# Altium PCB FCM_Integrated.PcbDoc (part 2 of 3)
Units mil, origin at the board's own origin, x right, y up, seen from the top; angles counter-clockwise.
Board outline 5445 x 4366 mil, 4 copper layers (Top Layer, Power, Ground, Bottom Layer), stack 23.756 mil thick; 165 components, 92 nets, 629 pads, 170 vias.
Unrouted connection lines stored in the file: 134.
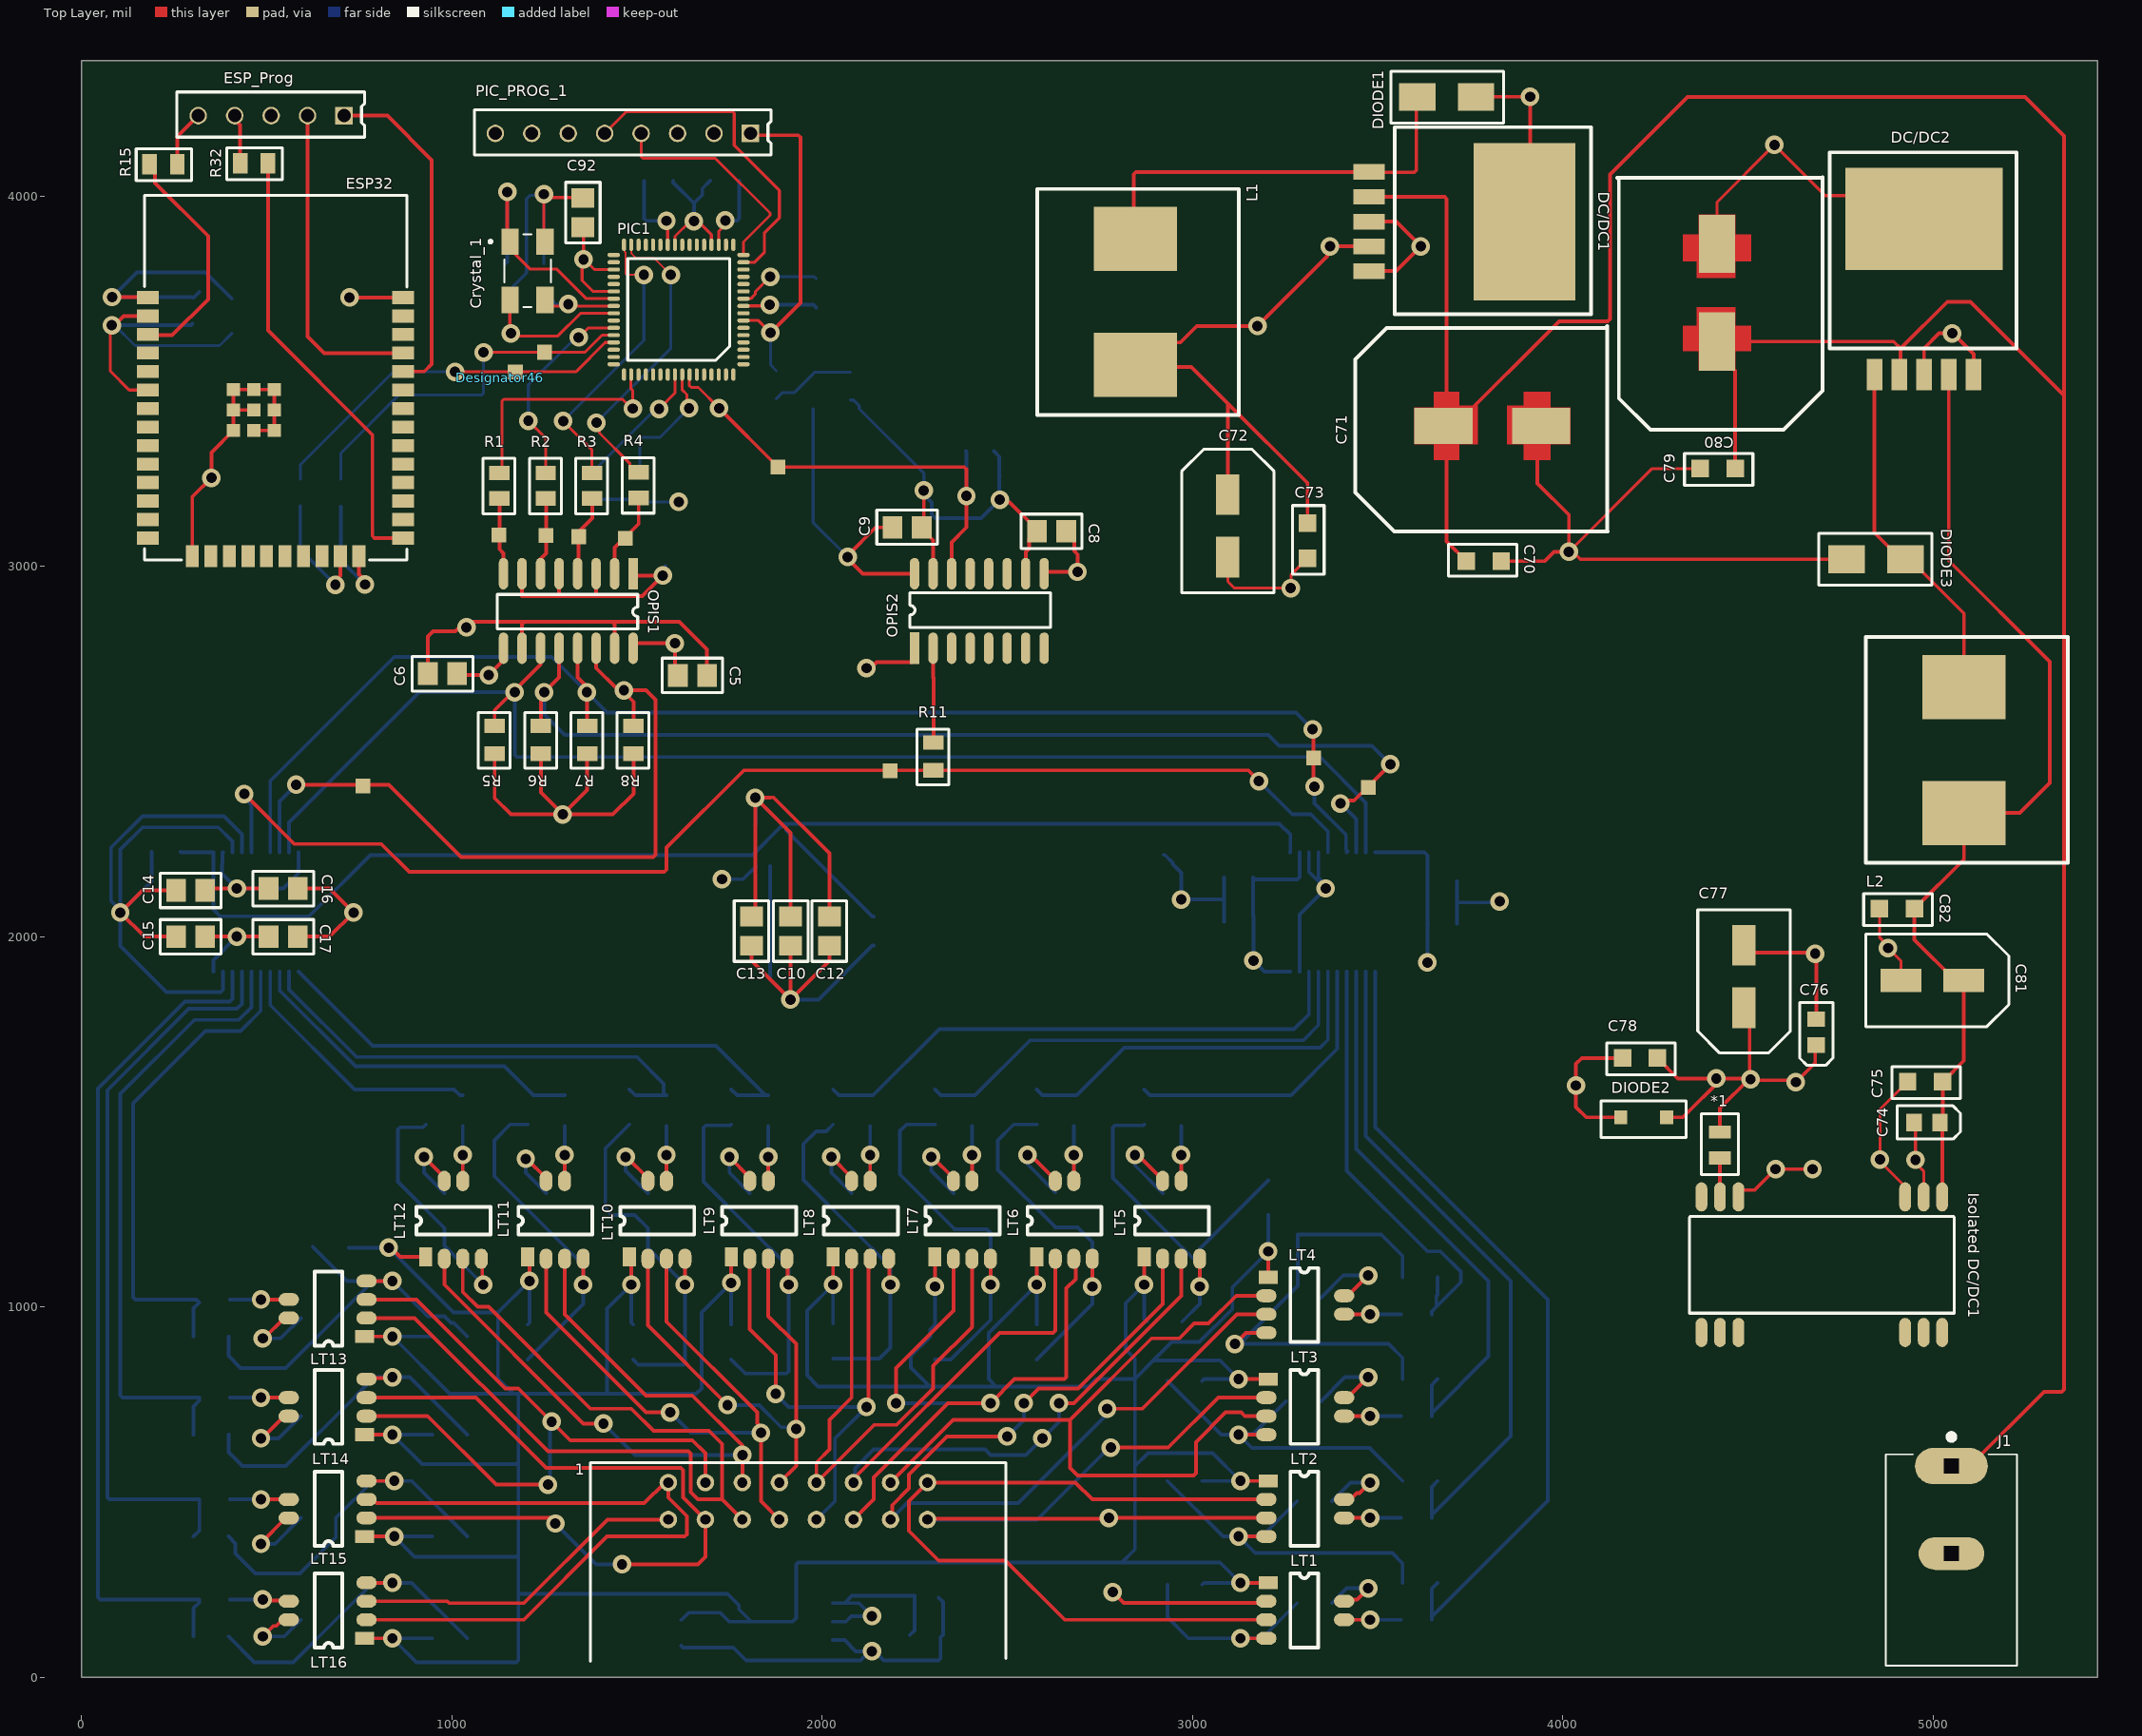
[diagram p0: Top Layer view]

## Part data (continued)
U1: "Precision Micropower, Low Dropout Voltage Reference, 2.048 V Output, 2.3 to 15 V Supply, Industrial, 8-pin SOIC (R-8), Reel", Manufacturer="Analog Devices", Operating Temp Range="-40 to 85 degC", Code_JEDEC=MS-012-AA, ComponentLink1Description="Manufacturer URL", ComponentLink1URL=http://www.analog.com/en/index.html, ComponentLink2Description=Datasheet, ComponentLink2URL=http://www.analog.com/static/imported-files/data_sheets/REF19xSeries.pdf, ComponentLink3Description="Package Specification", ComponentLink3URL=http://www.analog.com/static/imported-files/packages/PKG_PDF/SOIC_Narrow%20(R)/R_8.pdf, ComponentLink4Description="URL Link1", ComponentLink4URL="Product URL:http://www.analog.com/en/special-linear-functions/voltage-references/ref191/products/product.html", DatasheetVersion="Rev. L", Mounting Technology="Surface Mount", PackageDescription="8-Pin Standard Small Outline Package, Body 4.9 x 3.9 mm, Pitch 1.27 mm", PackageReference=R-8, PackageVersion="060506-A, 06/2006", Packing=Reel, PartNumber=REF191GSZ-REEL, Ref Out TC (ppm/C)=10, Vout=2.048V
Vref_1: library part MAX6037AAUKADJ+T, "IC VREF SERIES ADJ 0.2% SOT23-5", Case/Package=SOT-23-5, Manufacturer=Maxim, Max Input Voltage=5.5V, Max Operating Temperature=125°C, Max Output Current=5mA, Max Output Voltage=5V, Max Supply Current=250uA, Min Operating Temperature=-40°C, Min Output Voltage=1.184V, Package Quantity=1, Supplier Part Number 1=MAX6037AAUKADJ+TCT-ND, Temperature Coefficient=25ppm/°C, Tolerance=0.2%, Category="Voltage References", ComponentLink1Description=https://datasheet.ciiva.com/2008/max6037-max6037c-2008462.pdf?src-supplier=Digi-Key, ComponentLink1URL=https://datasheet.ciiva.com/2008/max6037-max6037c-2008462.pdf?src-supplier=Digi-Key, ComponentLink2Description=https://datasheet.ciiva.com/2008/max6037-max6037c-2008463.pdf?src-supplier=Digi-Key, ComponentLink2URL=https://datasheet.ciiva.com/2008/max6037-max6037c-2008463.pdf?src-supplier=Digi-Key, ComponentLink3Description=https://datasheet.ciiva.com/2008/max6037-max6037c-2008461.pdf?src-supplier=Digi-Key, ComponentLink3URL=https://datasheet.ciiva.com/2008/max6037-max6037c-2008461.pdf?src-supplier=Digi-Key, Lead Free="Lead Free", Manufacturer Part Number=MAX6037AAUKADJ+T, Mount="Surface Mount", Number of Pins=5, Operating Supply Current=250uA, Output Current=5mA, Output Type=Adjustable, Output Voltage=5V, Packaging="Tape and Reel", Radiation Hardening=No, REACH SVHC=Unknown, Reference Type=Series,Adjustable, Reference Voltage=5V, RoHS=Yes, RoHS Compliant=Yes, Series=-, Supplier 1=Digi-Key, Weight=0.001058oz

## Free pads (board coordinates)
  rect 40x40 smd: 1(760,2407) 1(1128,3084) 1(1171.84,3524.76) 1(1251,3578) 1(1255,3083) 1(1343,3080) 1(1469,3075) 1(1881,3268) 1(2184,2448) 1(3327.5,2482.5) 1(3475,2403)
  rect 40x40 smd far side: 1(1320,223) 1(2090,2304) 1(2643,310)

## Via types
v1: diameter 50, hole 28, Top Layer to Bottom Layer, 170 vias

## Nets (pads, with @x,y where several pads share a name; then routed paths per layer and width w, separated by ;. In a path a pad name is that pad's centre, name@x,y a point inside that pad or via, vN(x,y) a via of type N, cw(c..) or ccw(c..) an arc to the next point about the centre after c; other vN are vias at no path point)
2.048_VDC: C20.2 C21.1 C22.2 C25.2 C28.2 C31.2 C34.2 C37.2 C40.2 C43.2 C46.2 C48.2 C52.2 C54.2 C58.2 C60.2 C64.2 C66.2 LT1.1 LT2.1 LT3.1 LT4.1 LT5.1 LT6.1 LT7.1 LT8.1 LT9.1 LT10.1 LT11.1 LT12.1 LT13.1 LT14.1 LT15.1 LT16.1 pad.1@1320,223 pad.1@2643,310 U1.6 | length 13046
  Top Layer w10: LT16.1@765,105 v1(840,105) ; LT15.1@765,380 v1(845,380) ; LT14.1@765,655 v1(840,655) ; LT13.1@765,920 v1(840,920) ; v1(830,1160) 836.57,1160 861.57,1135 LT12.1@930,1135 ; LT11.1@1205,1135 1210,1130 v1(1210,1070) ; LT10.1@1480,1135 1485,1130 v1(1485,1060) ; v1(1755,1065) LT9.1@1755,1135 ; v1(2030,1060) LT8.1@2030,1135 ; v1(2305,1055) LT7.1@2305,1135 ; v1(2580,1060) LT6.1@2580,1135 ; v1(2870,1060) LT5.1@2870,1135 ; v1(3125,805) LT3.1@3205,805 ; v1(3130,255) LT1.1@3205,255 ; v1(3130,530) LT2.1@3205,530 ; LT4.1@3205,1080 v1(3205,1150)
  Bottom Layer w10: C64.2@722.24,1160 v1(830,1160) 1005,985 1125,985 ; C66.2@947.76,105 v1(840,105) 905,40 1174.14,40 1180,45.86 1180,225 ; C60.2@947.76,380 v1(845,380) 900,325 1174.14,325 1180,330.86 ; C54.2@947.76,655 v1(840,655) 920,575 1174.14,575 1180,580.86 ; C48.2@947.76,920 v1(840,920) 995,765 1166.72,765 ; C58.2@1205,952.24 1210,957.24 v1(1210,1070) 1125,985 ; C52.2@1490,952.24 1485,957.24 v1(1485,1060) 1420,995 1420,765 ; C21.1@1620,155 1620.98,155 1640.22,174.24 C20.2@1725,174.24 1749.24,150 U1.6@1809.02,150 ; C46.2@1755,952.24 v1(1755,1065) 1675,985 1675,780 1660,765 1420,765 ; C43.2@2030,955 v1(2030,1060) 1960,990 1960,815 1990,785 2291.27,785 ; v1(2305,1055) C40.2@2305,952.24 2291.98,939.23 2291.98,919.48 2240,867.5 2240,836.27 2291.27,785 ; C37.2@2580,952.24 v1(2580,1060) 2450,930 2450,805 2470,785 ; C34.2@2877.76,960 2870,967.76 v1(2870,1060) 2820,1010 2820,885 2845,860 2845,805 ; C22.2@3027.24,250 3032.24,255 v1(3130,255) 3075,310 2810,310 ; C25.2@3027.24,530 v1(3130,530) 3055,605 2880,605 2845,570 ; C28.2@3027.24,800 3032.24,805 v1(3125,805) 3075,855 2895,855 ; C31.2@3205,1247.76 v1(3205,1150) 3108.24,1053.24 3108.24,994.1 3019.14,905 2945,905 2895,855 ; 1125,985 1125,806.72 1166.72,765 ; 1166.72,765 1185,765 ; 1180,225 1180,330.86 ; 1180,225 1745,225 1775.7,194.3 1775.7,183.31 U1.6@1809.02,150 ; 1180,330.86 1180,580.86 ; 1180,580.86 1180,760 1185,765 ; 1185,765 1420,765 ; U1.6@1809.02,150 U1.6@1840.51,150 1920,150 1930,160 1930,304.14 1935.86,310 2810,310 ; 2291.27,785 2470,785 ; 2470,785 2720,785 2740,805 2845,805 ; 2810,310 2845,345 2845,570 ; 2845,570 2845,805 ; 2845,805 2895,855
5VDC: "Isolated DC/DC1.1" C74.1 C75.2 C81.1 C82.2 DC/DC2.4 L2.2 | length 2668.8
  Top Layer w10: C74.1@5019.06,1498 5025,1492.06 5025,1297 ; C74.1@5019.06,1500.95 5026.31,1508.2 C75.2@5026.31,1608 5083,1664.69 C81.1@5083,1882 5059.38,1882 4950.24,1991.13 C82.2@4950.24,2075 5084,2208.76 L2.2@5084,2334 5235,2334 5316,2415 5316,2742 5042.93,3015.07 DC/DC2.4@5042.93,3517.92
+3V3: C7.1 C8.2 C9.2 C72.1 C73.2 C83.1 C85.1 C89.2 C90.2 C91.1 C92.2 DC/DC1.4 ESP32.2 L1.2 OPIS1.1 OPIS1.3 OPIS1.5 OPIS1.7 OPIS2.10 OPIS2.15 PIC1.10 PIC1.19 PIC1.26 PIC1.35 PIC1.38 PIC1.57 PIC_PROG_1.2 R9.2 R13.2 | length 5805.9
  Top Layer w8: v1(82,3651) 78,3647 78,3527 129,3476 ESP32.2@180.02,3476 ; C92.2@1354,3915.63 1355.97,3913.66 v1(1355.97,3828.63) ; PIC1.38@1437.61,3742.37 1381.63,3742.37 1352,3772 1352,3826.63 1354,3828.63 v1(1355.97,3828.63) ; PIC1.35@1437.61,3801.43 1385.14,3801.43 1357.94,3828.63 v1(1355.97,3828.63) ; v1(1580,3933) 1583.1,3929.9 1583.1,3868.53 PIC1.26@1583.28,3868.35 ; PIC1.57@1622,3502.47 1622,3477 1635,3464 1635,3433 v1(1641,3427) ; PIC1.19@1721.07,3868.35 1721.07,3904.71 1739,3922.63 v1(1739,3934) ; PIC1.10@1788,3722.68 1788.17,3722.86 1807.49,3722.86 1820,3735.37 1820,3742 v1(1860,3782)
  Top Layer w10: v1(82,3651) 88.57,3651 113.57,3676 ESP32.2@180.02,3676 ; OPIS1.7@1190,2966.18 1190,2920 1290,2920 ; OPIS1.5@1290,2966.18 1290,2920 ; OPIS1.3@1390,2966.18 1390,2925.86 1384.14,2920 ; OPIS1.1@1490,2966.18 1490,2967.4 1497.6,2975 v1(1570,2975) 1515,2920 1384.14,2920 ; v1(2275,3205) 2275,3110.63 C9.2@2269.37,3105 2269.37,3101.06 2300,3070.43 OPIS2.15@2300,2980 ; v1(2480,3180) 2487.65,3172.35 2507.22,3172.35 2580.63,3098.94 C8.2@2580.63,3095 2559.06,3073.43 2559.06,3047.74 2550,3038.69 OPIS2.10@2550,2980 ; L1.2@2900.77,3537.92 2997.68,3537.92 3096,3439.59 ; L1.2@2900.77,3552.06 2953.2,3604.49 2967.35,3604.49 3011.86,3649 v1(3176,3649) 3364.35,3837.35 3364.35,3856.35 v1(3372,3864) DC/DC1.4@3477,3864 ; C72.1@3096,3193.64 3096,3439.59 ; C73.2@3311,3116.24 3311,3224.59 3096,3439.59 ; 1290,2920 1384.14,2920
  Bottom Layer w8: v1(82,3651) 89.84,3651 144.84,3596 373.24,3596 C7.1@406,3628.76 ; C89.2@1502,3263.37 1508,3269.37 1508,3343.31 1512.69,3348 1562,3348 v1(1641,3427) ; v1(1860,3782) 1979.37,3782 C85.1@1984,3777.37 ; R13.2@2077,3449 2084.87,3449 2100.56,3433.31 2100.56,3425.44 2275,3251 v1(2275,3205)
  Bottom Layer w10: v1@89.84,3651 296,3651 C83.1@300,3655 ; C90.2@1519.63,4040 1520,4039.63 1520,3938.86 1525.86,3933 v1(1580,3933) ; 1577.65,3000.53 1577.65,2982.65 v1(1570,2975) v1@1579.86,2975 ; v1(1739,3934) 1771,3934 1776.86,3939.86 1776.86,3977.43 1776.37,3977.92 C91.1@1776.37,4041 ; v1(2275,3205) 2275,3194.18 2296.8,3172.38 2296.8,3139.06 2305.86,3130 2430,3130 v1(2480,3180) ; R9.2@2464,3311 2478.69,3296.31 2478.69,3244.12 ; v1@2478.69,3181.31 2478.69,3244.12 ; 2480,3242.8 2478.69,3244.12